# Altium PCB 5v_3v3_vr.PcbDoc
Units mm, origin at the board's own origin, x right, y up, seen from the top; angles counter-clockwise.
Board outline 27.3 x 36.45 mm, 2 copper layers (Top Layer, Bottom Layer); 7 components, 4 nets, 20 pads, 0 vias.
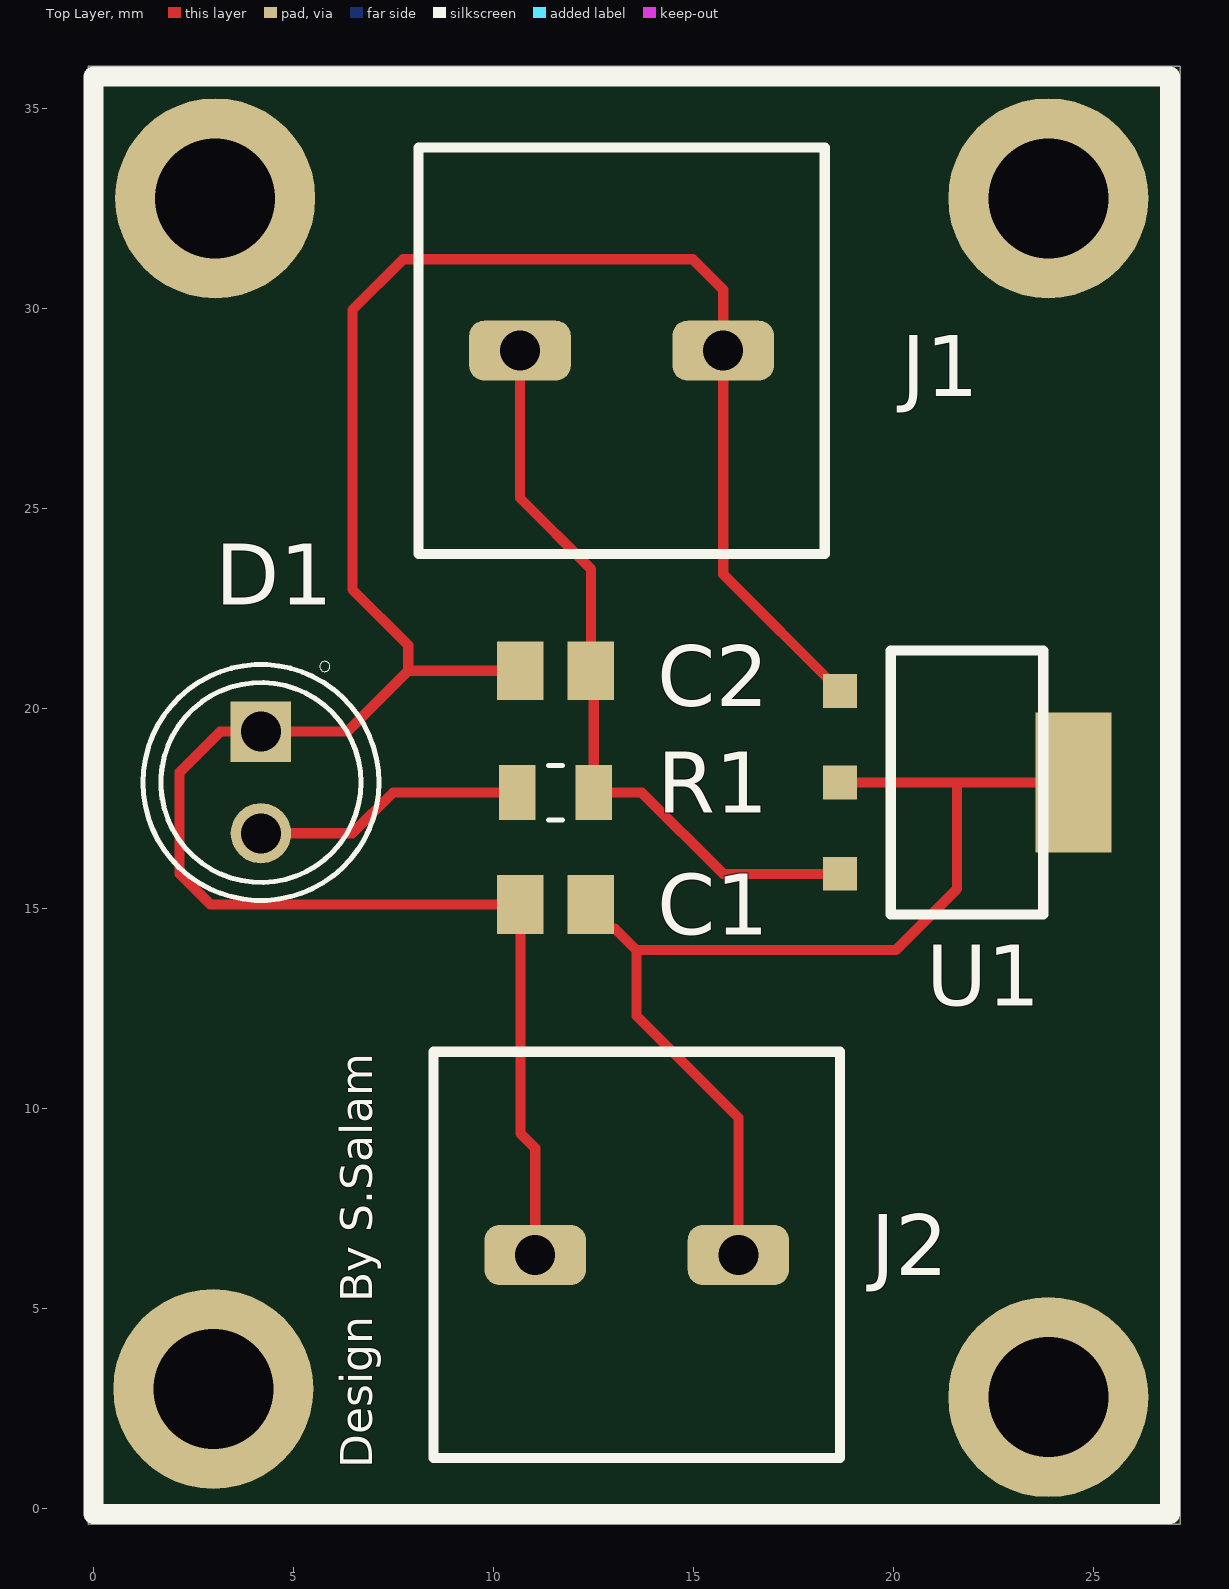
[diagram p0: Top Layer view]
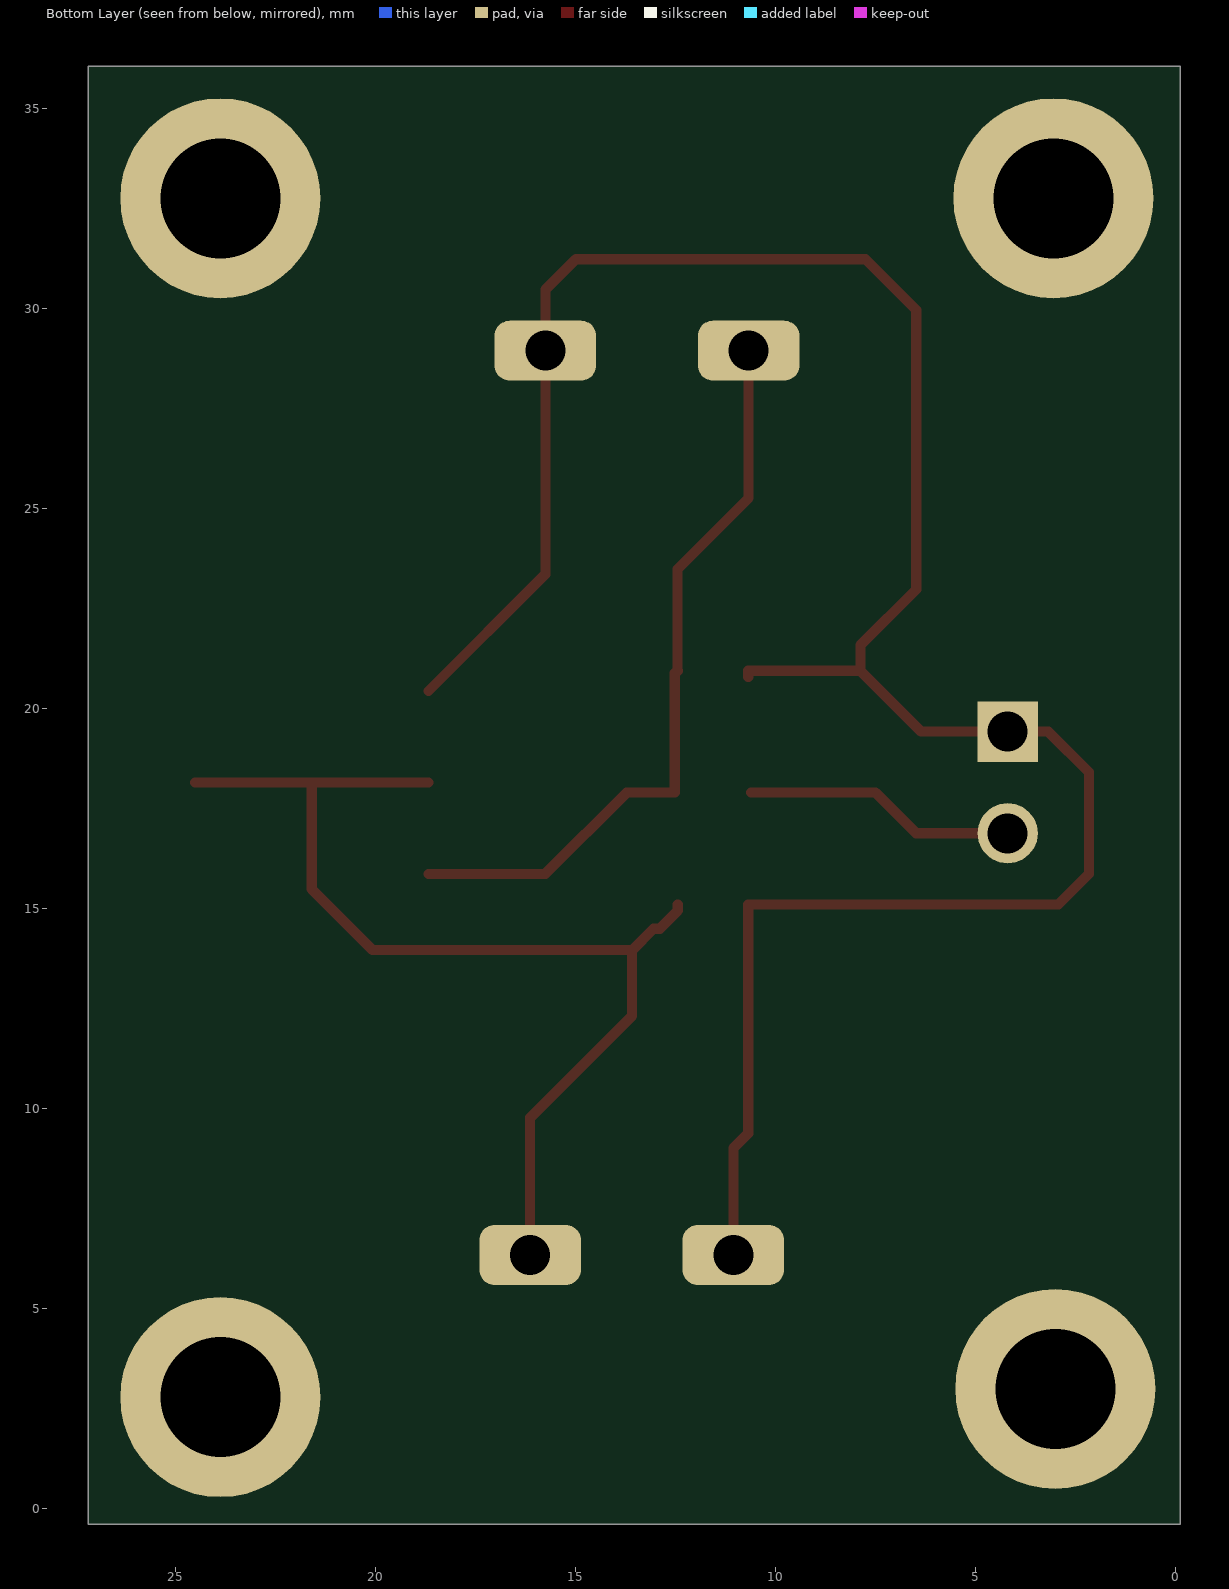
[diagram p1: Bottom Layer view, seen from below]
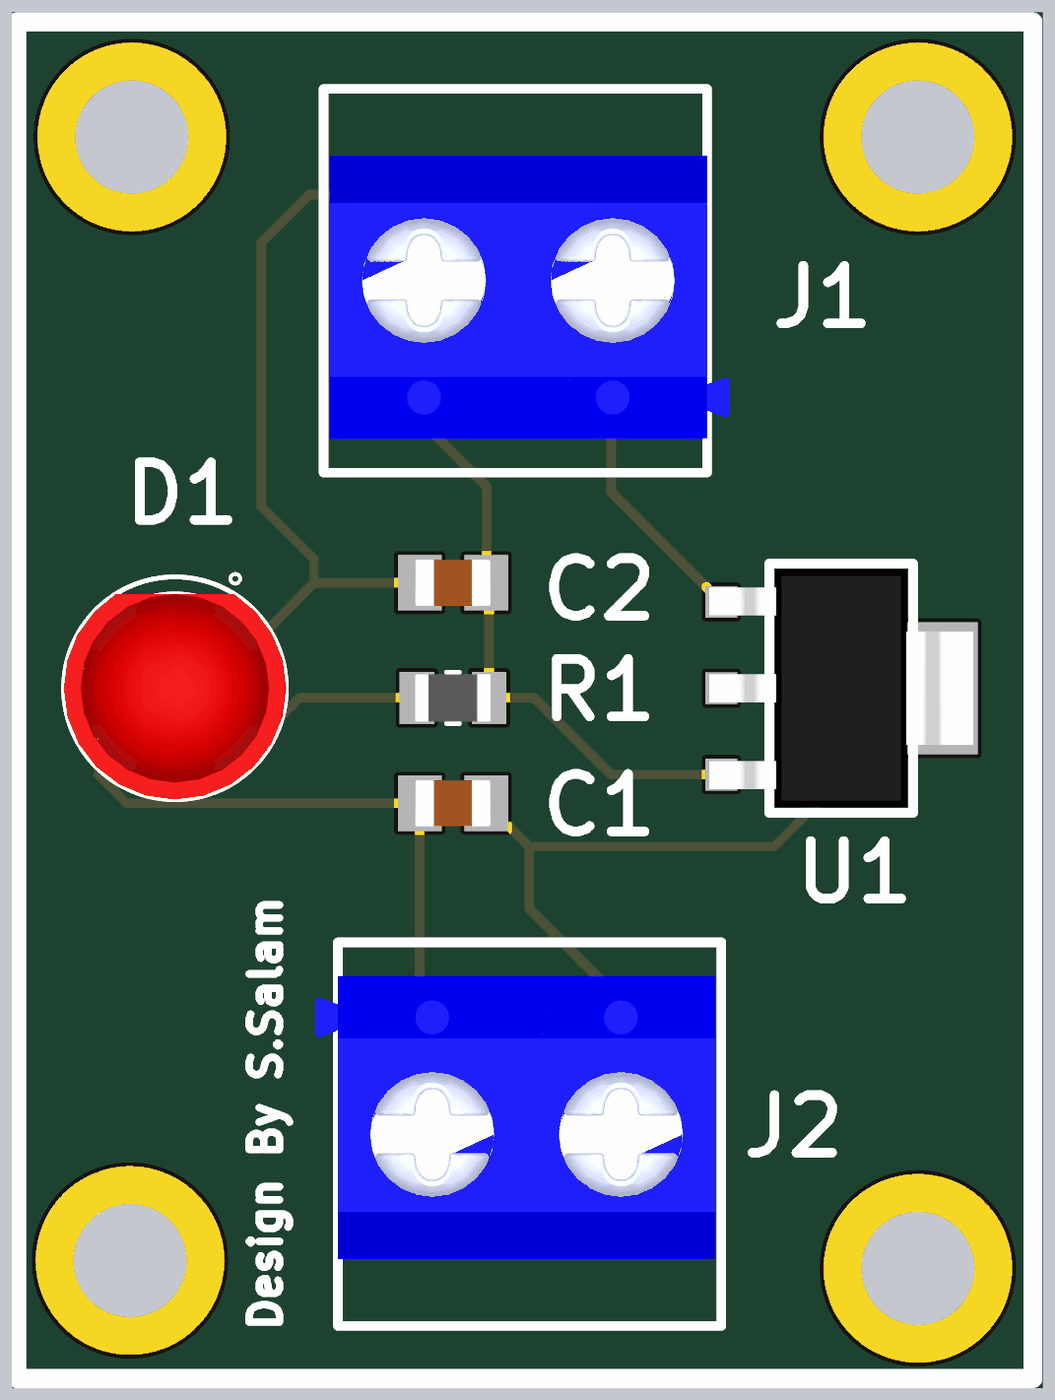
[diagram p2: 3D render of the assembled board from above, using the file's embedded part models]

## Layer stack, top to bottom
Top Solder: solder mask 0.0102, Solder Resist, Dk 3.5
Top Layer: signal copper 0.0356
Dielectric 1: dielectric 0.32, FR-4, Dk 4.8
Bottom Layer: signal copper 0.0356
Bottom Solder: solder mask 0.0102, Solder Resist, Dk 3.5

## Board outline
-0.127,-0.381 27.178,-0.381 27.178,36.068 -0.127,36.068

## Design rules (kind name [scope] priority, off if disabled: settings)
Clearance [All] p1: gap=0.254 ignorepadtopadclearanceinfootprint=FALSE
PolygonConnect [All] p1: connectstyle=Relief reliefconductorwidth=0.254 reliefentries=4 polygonreliefangle="90 Angle" airgapwidth=0.254
RoutingVias [All] p1: holewidth=0.711 width=1.27 viastyle="Through Hole" minholewidth=0.711 minwidth=1.27 maxholewidth=0.711 maxwidth=1.27
SolderMaskExpansion [All] p1: expansion=0.102 istentingtop=FALSE
SupplyNets "Schematic Supply Nets_1" [InNet('+5V')] p1: voltage=0.000
SupplyNets "Schematic Supply Nets" [InNet('3V3')] p2: voltage=0.000
Width [All] p1: maxlimit=0.254 minlimit=0.254 preferedwidth=0.254
30 further rules are at their usual default settings.

## Components (designator, comment, footprint, x,y, rotation, side; value= is the part's Value field where it differs from the comment)
C1 "10uF" CAPC2012X94N 11.557,15.113 r0 top
C2 "10uF" CAPC2012X94N 11.557,20.955 r0 top
D1 "LED" LED_WP7113ID 4.191,18.161 r270 top
J1 "KF301_2P" KF301_2P 13.208,28.956 r0 top
J2 "KF301_2P" KF301_2P 13.589,6.35 r180 top
R1 "220" RESC2012X60N 11.557,17.907 r180 top
U1 "AMS1117-3v3" AMS1117-3V3 21.844,18.161 r270 top

## Footprints (in the part's own frame and the unit in brackets; to place one, negate y for a bottom-side part, rotate by r counter-clockwise, add the part's x,y. Pads: shape width x height; smd on the part's side, far side on the other; paste and mask are expansions set on the pad)
AMS1117-3V3 [mm] "low-dropout (LDO) linear voltage regulator available in fixed and adjustable output versions, designed for reliable low-voltage regulation up to 1A."
  rect 0.84x0.84 smd: 1(-2.286,-3.175) 2(0,-3.175) 3(2.286,-3.175)
  rect 3.5x1.9 smd: 2(0,2.667)
  silkscreen extent -3.3,-1.91 3.3,1.91, body extent -3.15,-3.5 3.15,3.5, height 1.6
CAPC2012X94N [mm]
  rect 1.16x1.47 smd: 1(-0.88,0) 2(0.88,0)
  body extent -1,-0.63 1,0.63, height 0.94
KF301_2P [mm]
  rrect50% 2.54x1.5 hole 1: 1(-2.54,0) 2(2.54,0)
  silkscreen extent -5.08,-5.08 5.08,5.08, body extent -4.92,-4.19 5.68,3.31, height 9.4
LED_WP7113ID [mm]
  round 1.508 hole 1: A(1.27,0)
  rect 1.508x1.508 / inner round 1.508 / far side rect 1.508x1.508 hole 1: C(-1.27,0)
  silkscreen extent -3.03,-2.95 2.95,2.95, body extent -2.5,-2.95 2.95,2.95, height 9.6
RESC2012X60N [mm]
  rect 0.92x1.38 smd: 1(-0.955,0) 2(0.955,0)
  silkscreen extent -0.17,-0.68 0.17,0.68, body extent -1,-0.63 1,0.63, height 0.6

## Part data
C1 C2: library part 0805YC103J4T2A, "10000 pF Â±5% 16V Ceramic Capacitor X7R 0805 (2012 Metric)", Package="2012 AVX", Check_prices=https://www.snapeda.com/parts/0805YC103J4T2A/AVX/view-part/?ref=eda, MF=AVX, MP=0805YC103J4T2A, SnapEDA_Link=https://www.snapeda.com/parts/0805YC103J4T2A/AVX/view-part/?ref=snap
D1: library part WP7113ID, "Red 617nm LED Indication - Discrete 2V Radial", Package="Radial Kingbright", Availability="In Stock", Check_prices=https://www.snapeda.com/parts/WP7113ID/Kingbright/view-part/?ref=eda, MF=Kingbright, MP=WP7113ID, Price=None, Purchase-URL=https://pricing.snapeda.com/search/part/WP7113ID/?ref=eda, SnapEDA_Link=https://www.snapeda.com/parts/WP7113ID/Kingbright/view-part/?ref=snap
R1: library part RC0805FR-07910RL, "910 Ohms Â±1% 0.125W, 1/8W Chip Resistor 0805 (2012 Metric) Moisture Resistant Thick Film", Package="2012 Rohm Semiconductor", Availability="In Stock", MF=Yageo, MP=RC0805FR-07910RL, Price=None, Purchase-URL=https://pricing.snapeda.com/search/part/RC0805FR-07910RL/?ref=eda
U1: "low-dropout (LDO) linear voltage regulator available in fixed and adjustable output versions, designed for reliable low-voltage regulation up to 1A."

## Free pads (board coordinates)
  round 5 hole 3: 1(3,3) 1(3.048,32.766) 1(23.876,2.794) 1(23.876,32.766)

## Nets (pads, with @x,y where several pads share a name; then routed paths per layer and width w, separated by ;. In a path a pad name is that pad's centre, name@x,y a point inside that pad or via, vN(x,y) a via of type N, cw(c..) or ccw(c..) an arc to the next point about the centre after c; other vN are vias at no path point)
3V3: C1.2 J2.1 U1.2 | length 27.5
  Top Layer w0.254: C1.2 12.437,14.958 12.89,14.505 13.045,14.505 13.58,13.97 ; J2.1 16.129,9.779 13.58,12.328 13.58,13.97 ; U1.2@18.669,18.161 21.59,18.161 ; U1.2@24.511,18.161 21.59,18.161 ; 13.58,13.97 20.066,13.97 21.59,15.494 21.59,18.161
+5V: C2.2 J1.1 R1.1 U1.3 | length 18.8
  Top Layer w0.254: J1.1 10.668,25.273 12.446,23.495 12.446,20.964 C2.2@12.455,20.955 ; C2.2 C2.2@12.455,20.955 ; U1.3 15.748,15.875 13.716,17.907 R1.1 12.512,20.898 C2.2@12.455,20.955
NetC1_1: C1.1 C2.1 D1.C J1.2 J2.2 U1.1 | length 61
  Top Layer w0.254: C2.1@10.677,20.8 C2.1 7.874,20.955 ; J2.2 11.049,9.017 10.677,9.389 C1.1 2.921,15.113 2.159,15.875 2.159,18.415 3.175,19.431 D1.C 6.35,19.431 7.874,20.955 ; U1.1 15.748,23.368 J1.2 15.748,30.48 14.986,31.242 7.747,31.242 6.477,29.972 6.477,22.987 7.874,21.59 7.874,20.955
NetD1_A: D1.A R1.2 | length 6.8
  Top Layer w0.254: D1.A 6.477,16.891 7.493,17.907 R1.2

## Silkscreen, mask and mechanical layers (free items; w line width, h text height)
Top Overlay:
  lines w0.5: 0,-0.127 26.924,-0.127 26.924,35.814 0,35.814 0,-0.127
  text "Design By S.Salam" at 6.972,1.016 h0.8 r90